# Altium PCB Riser.PcbDoc
Units mm, origin at the board's own origin, x right, y up, seen from the top; angles counter-clockwise.
Board outline 111.2 x 80.01 mm, 2 copper layers (Top Layer, Bottom Layer); 11 components, 61 nets, 322 pads, 0 vias.
Unrouted connection lines stored in the file: 1.
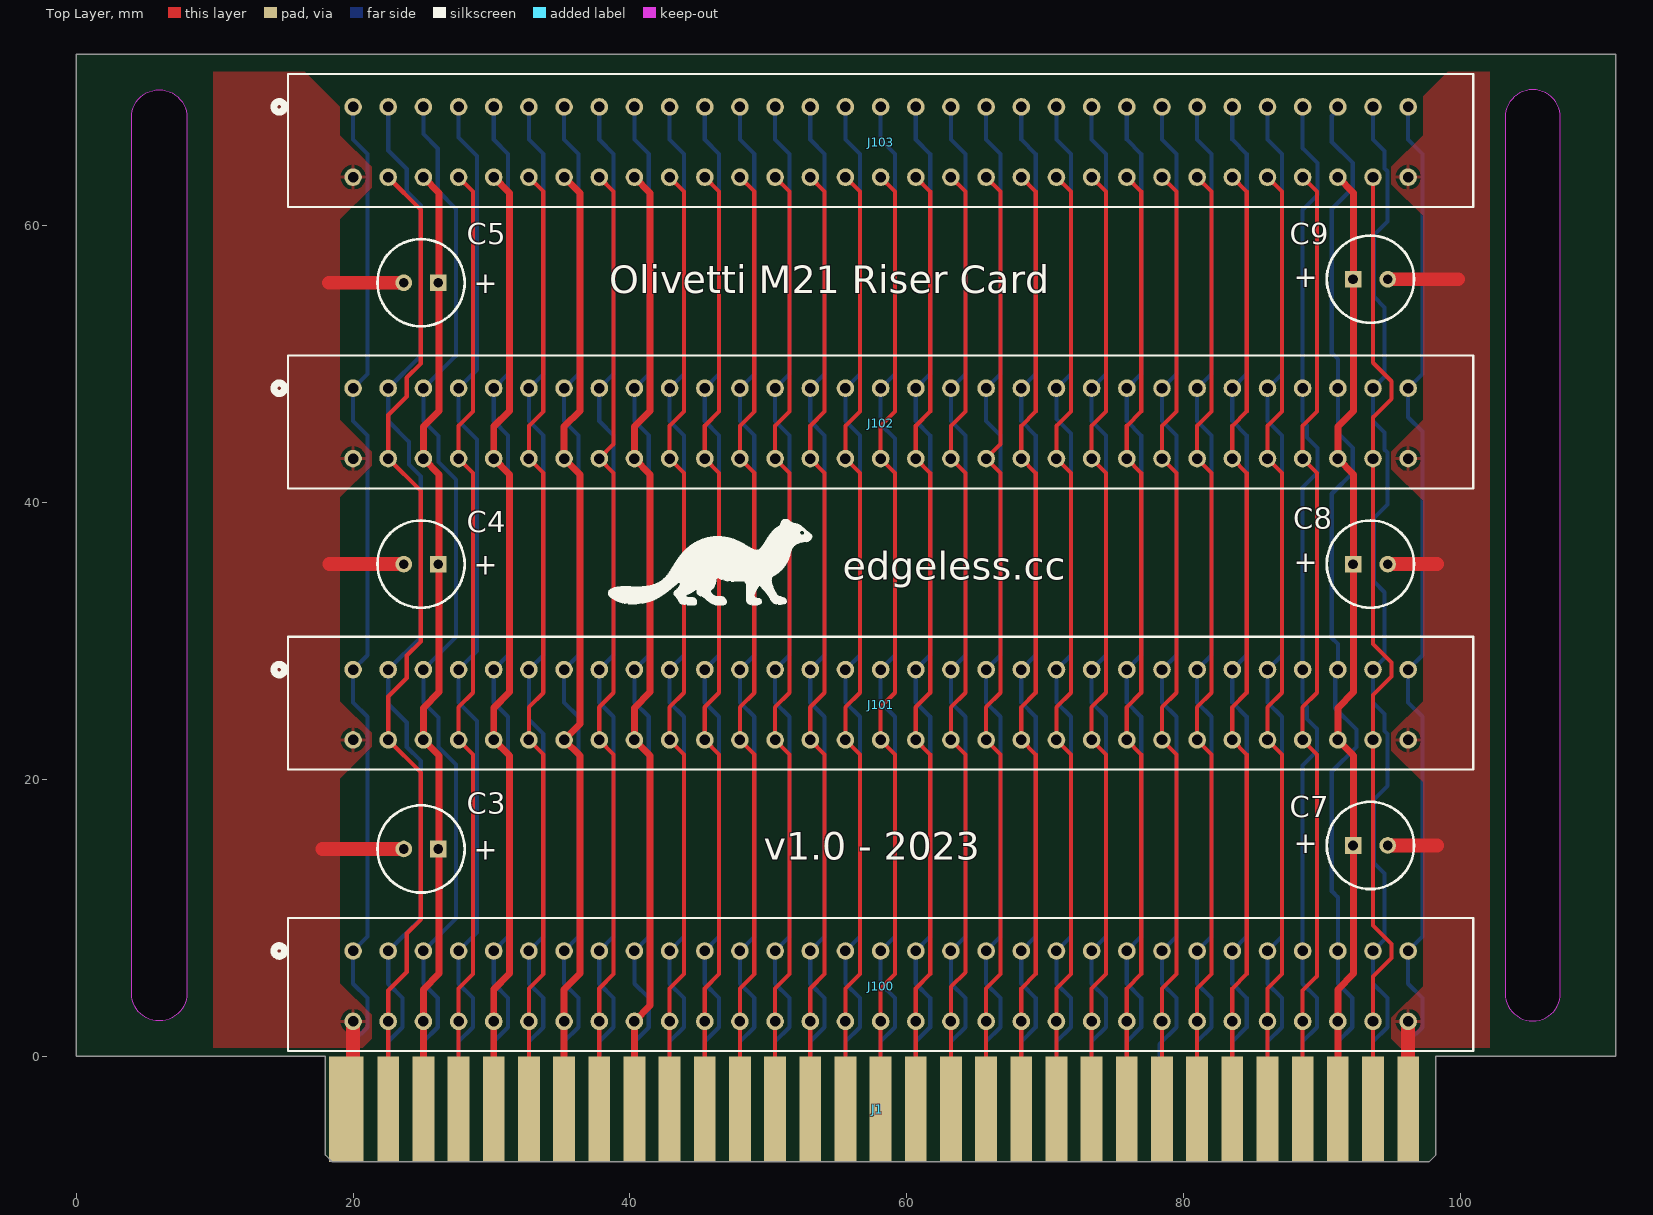
[diagram p0: Top Layer view]
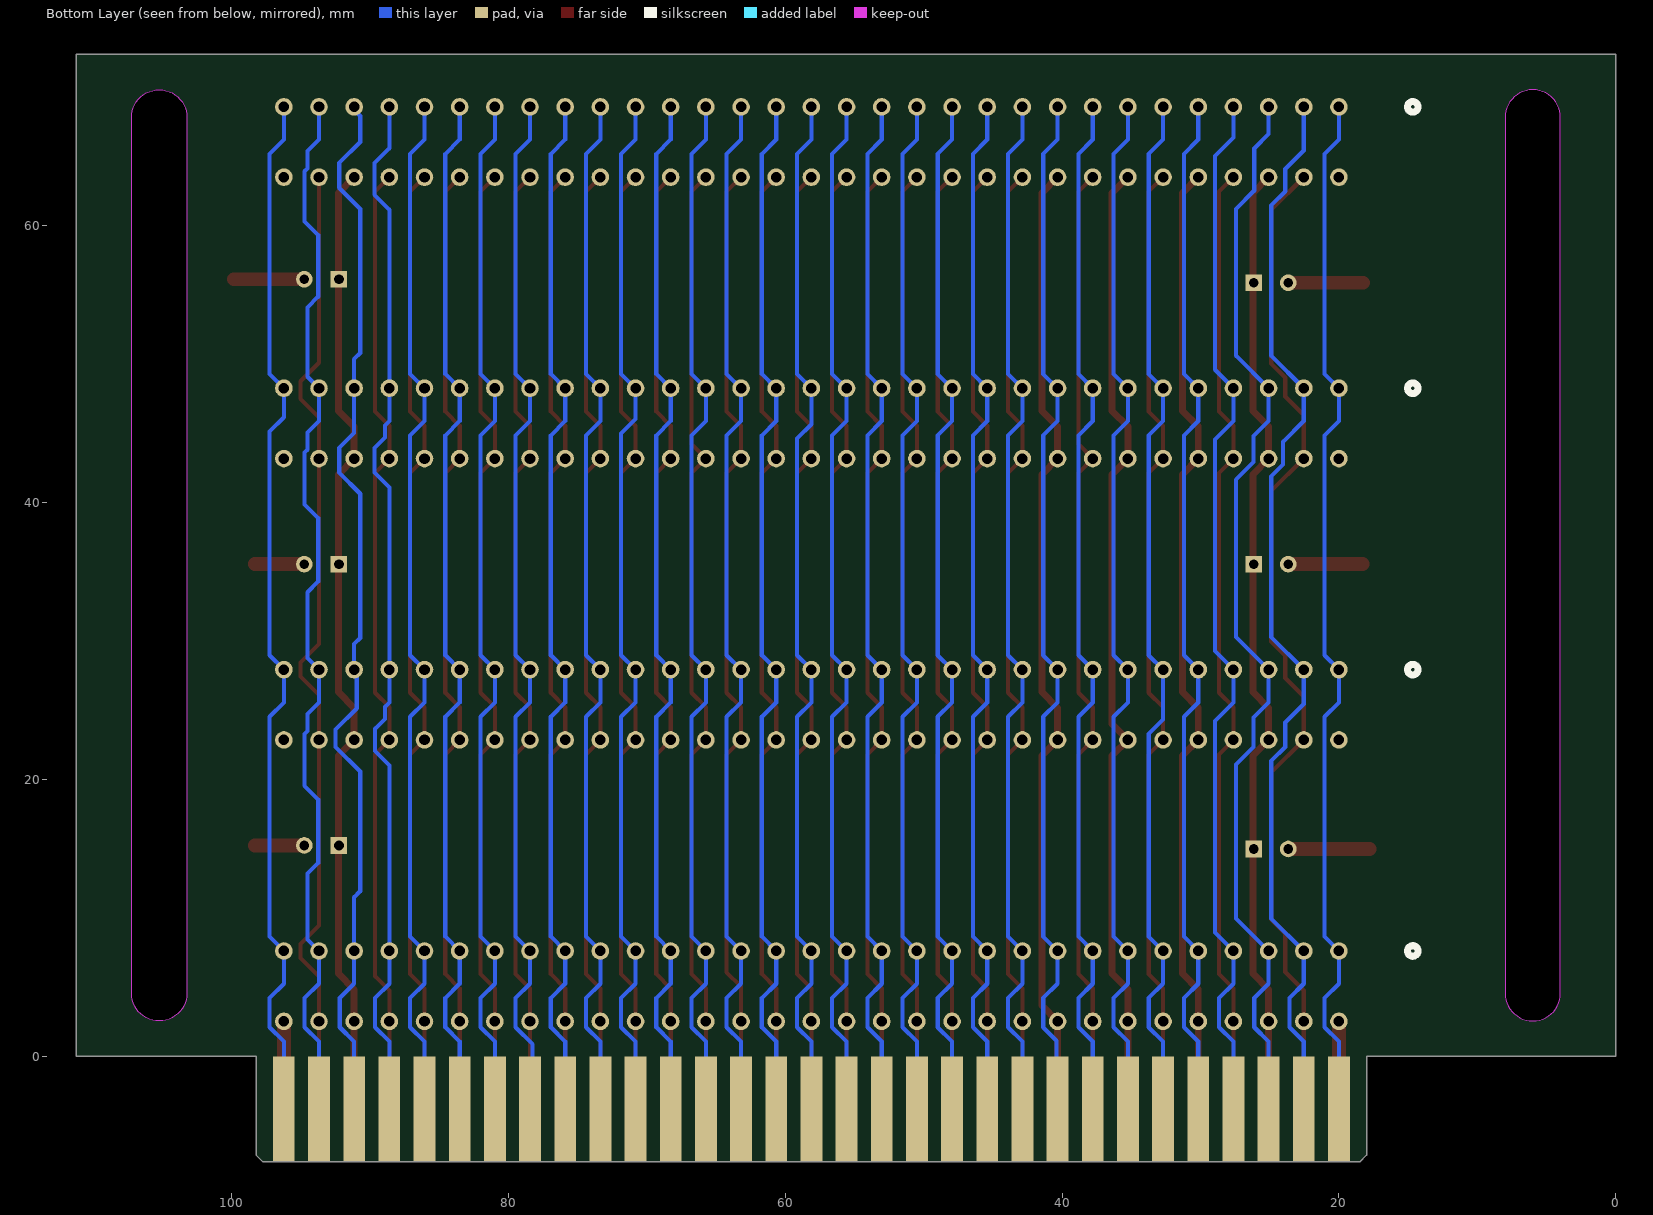
[diagram p1: Bottom Layer view, seen from below]

## Layer stack, top to bottom
Top Solder: solder mask 0.0102, Solder Resist, Dk 3.5
Top Layer: signal copper 0.0356
Dielectric 1: dielectric 0.32, FR-4, Dk 4.8
Bottom Layer: signal copper 0.0356
Bottom Solder: solder mask 0.0102, Solder Resist, Dk 3.5

## Board outline
97.696,-7.62 98.2,-7.116 98.2,0 111.2,0 111.2,72.39 0,72.39 0,0 18,0 18,-7.116 18.504,-7.62
cut-out: 103.2,4.572 ccw(c105.2,4.572) 107.2,4.572 107.2,67.818 ccw(c105.2,67.818) 103.2,67.818
cut-out: 4,4.572 4,67.818 cw(c6,67.818) 8,67.818 8,4.572 cw(c6,4.572)

## Design rules (kind name [scope] priority, off if disabled: settings)
Clearance [All] p1: gap=0.254 ignorepadtopadclearanceinfootprint=FALSE except(0: Arc-Hole Track-Hole SMDPad-Hole THPad-Hole Via-Hole Fill-Hole Poly-Hole Region-Hole Text-Hole)
PolygonConnect [All] p1: connectstyle=Relief reliefconductorwidth=0.254 reliefentries=4 polygonreliefangle="90 Angle" airgapwidth=0.254
RoutingVias [All] p1: holewidth=0.711 width=1.27 viastyle="Through Hole" minholewidth=0.711 minwidth=1.27 maxholewidth=0.711 maxwidth=1.27
SolderMaskExpansion [All] p1: expansion=0.102 istentingtop=FALSE
Width Width_PWR [InNetClass('PWR')] p1: maxlimit=2 minlimit=0.5 preferedwidth=0.5
Width [All] p2: maxlimit=2 minlimit=0.3 preferedwidth=0.3
30 further rules are at their usual default settings.

## Classes and differential pairs
net class PWR: B3_5V B5_N5V B7_N12V B9_12V B29_5V

## Components (designator, comment, footprint, x,y, rotation, side; value= is the part's Value field where it differs from the comment)
C3 "100u" CAP-6.3-2.5 24.912,14.986 r0 top
C4 "100u" CAP-6.3-2.5 24.912,35.56 r0 top
C5 "100u" CAP-6.3-2.5 24.912,55.88 r0 top
C7 "100u" CAP-6.3-2.5 93.472,15.24 r180 top
C8 "100u" CAP-6.3-2.5 93.472,35.56 r180 top
C9 "100u" CAP-6.3-2.5 93.472,56.134 r180 top
J1 "8-bit ISA edge connector" ISA-EDGE-62 20,-3.81 r180 top
J100 "6-5530843-5" CONN62_6-5530843-5_TEC 20,5.08 r0 top
J101 "6-5530843-5" CONN62_6-5530843-5_TEC 20,25.4 r0 top
J102 "6-5530843-5" CONN62_6-5530843-5_TEC 20,45.72 r0 top
J103 "6-5530843-5" CONN62_6-5530843-5_TEC 20,66.04 r0 top

## Footprints (in the part's own frame and the unit in brackets; to place one, negate y for a bottom-side part, rotate by r counter-clockwise, add the part's x,y. Pads: shape width x height; smd on the part's side, far side on the other; paste and mask are expansions set on the pad)
CAP-6.3-2.5 [mm] "Polarized Capacitor (Radial); 2 Leads, 6.3 mm, 2.5 mm leads"
  rect 1.2x1.2 hole 0.7: 1(1.25,0)
  round 1.2 hole 0.7: 2(-1.25,0)
  silkscreen extent -3.15,-3.15 3.15,3.15
CONN62_6-5530843-5_TEC [mil]
  round 50 / inner round 60 / far side round 50 hole 30 paste-25 mask+0: A1(0,100) A2(100,100) A3(200,100) A4(300,100) A5(400,100) A6(500,100) A7(600,100) A8(700,100) A9(800,100) A10(900,100) A11(1000,100) A12(1100,100) A13(1200,100) A14(1300,100) A15(1400,100) A16(1500,100) A17(1600,100) A18(1700,100) A19(1800,100) A20(1900,100) A21(2000,100) A22(2100,100) A23(2200,100) A24(2300,100) A25(2400,100) A26(2500,100) A27(2600,100) A28(2700,100) A29(2800,100) A30(2900,100) A31(3000,100) B1(0,-100) B2(100,-100) B3(200,-100) B4(300,-100) B5(400,-100) B6(500,-100) B7(600,-100) B8(700,-100) B9(800,-100) B10(900,-100) B11(1000,-100) B12(1100,-100) B13(1200,-100) B14(1300,-100) B15(1400,-100) B16(1500,-100) B17(1600,-100) B18(1700,-100) B19(1800,-100) B20(1900,-100) B21(2000,-100) B22(2100,-100) B23(2200,-100) B24(2300,-100) B25(2400,-100) B26(2500,-100) B27(2600,-100) B28(2700,-100) B29(2800,-100) B30(2900,-100) B31(3000,-100)
  silkscreen extent -225,-184 3185,194
ISA-EDGE-62 [mm]
  rect 1.575x7.62 smd far side paste+0 mask+0: A1(0,0) A2(-2.54,0) A3(-5.08,0) A4(-7.62,0) A5(-10.16,0) A6(-12.7,0) A7(-15.24,0) A8(-17.78,0) A9(-20.32,0) A10(-22.86,0) A11(-25.4,0) A12(-27.94,0) A13(-30.48,0) A14(-33.02,0) A15(-35.56,0) A16(-38.1,0) A17(-40.64,0) A18(-43.18,0) A19(-45.72,0) A20(-48.26,0) A21(-50.8,0) A22(-53.34,0) A23(-55.88,0) A24(-58.42,0) A25(-60.96,0) A26(-63.5,0) A27(-66.04,0) A28(-68.58,0) A29(-71.12,0) A30(-73.66,0) A31(-76.2,0)
  rect 2.5x7.62 smd paste+0 mask+0: B1(0.5,0)
  rect 1.575x7.62 smd paste+0 mask+0: B2(-2.54,0) B3(-5.08,0) B4(-7.62,0) B5(-10.16,0) B6(-12.7,0) B7(-15.24,0) B8(-17.78,0) B9(-20.32,0) B10(-22.86,0) B11(-25.4,0) B12(-27.94,0) B13(-30.48,0) B14(-33.02,0) B15(-35.56,0) B16(-38.1,0) B17(-40.64,0) B18(-43.18,0) B19(-45.72,0) B20(-48.26,0) B21(-50.8,0) B22(-53.34,0) B23(-55.88,0) B24(-58.42,0) B25(-60.96,0) B26(-63.5,0) B27(-66.04,0) B28(-68.58,0) B29(-71.12,0) B30(-73.66,0) B31(-76.2,0)

## Part data
C3 C4 C5 C7 C8 C9: library part "Cap Pol1", "Polarized Capacitor (Radial)", LatestRevisionDate=17-Jul-2002, LatestRevisionNote="Re-released for DXP Platform.", PackageDescription="Polarized Capacitor (Radial); 2 Leads", PackageReference=RB7.6-15, Published=8-Jun-2000, Publisher="Altium Limited"
J1: library part ISA-EDGE-62
J100 J101 J102 J103: "No Description Available"

## Nets (pads, with @x,y where several pads share a name; then routed paths per layer and width w, separated by ;. In a path a pad name is that pad's centre, name@x,y a point inside that pad or via, vN(x,y) a via of type N, cw(c..) or ccw(c..) an arc to the next point about the centre after c; other vN are vias at no path point)
B1_GND: C3.2 C4.2 C5.2 C7.2 C8.2 C9.2 J1.B1 J1.B31 J100.B1 J100.B31 J101.B1 J101.B31 J102.B1 J102.B31 J103.B1 J103.B31 | length 41.6
  Top Layer w1: 17.78,14.986 C3.2 ; 18.254,55.88 C5.2 ; 18.288,35.56 C4.2 ; J1.B1@20,-3.81 J100.B1 ; C7.2 98.298,15.24 ; C8.2 98.298,35.56 ; C9.2 99.822,56.134 ; J1.B31 J100.B31
B3_5V: C3.1 C4.1 C5.1 J1.B3 J100.B3 J101.B3 J102.B3 J103.B3 | length 70.1
  Top Layer w0.5: J1.B3 25.08,4.851 26.219,5.99 26.219,21.721 J101.B3 25.08,25.171 26.219,26.31 26.219,42.041 J102.B3 25.08,45.491 26.219,46.63 26.219,62.361 J103.B3
B5_N5V: J1.B5 J100.B5 J101.B5 J102.B5 J103.B5 | length 70.1
  Top Layer w0.5: J1.B5 J100.B5 30.16,4.851 31.299,5.99 31.299,21.721 J101.B5 30.16,25.171 31.299,26.31 31.299,42.041 J102.B5 30.16,45.491 31.299,46.63 31.299,62.361 J103.B5
B7_N12V: J1.B7 J100.B7 J101.B7 J102.B7 J103.B7 | length 70.1
  Top Layer w0.5: J1.B7 J100.B7 35.24,4.851 36.379,5.99 36.379,21.721 J101.B7 36.379,23.999 36.379,42.041 J102.B7 35.24,45.491 36.379,46.63 36.379,62.361 J103.B7
B9_12V: J1.B9 J100.B9 J101.B9 J102.B9 J103.B9 | length 70.1
  Top Layer w0.5: J1.B9 J100.B9 41.459,3.679 41.459,21.721 J101.B9 40.32,25.171 41.459,26.31 41.459,42.041 J102.B9 40.32,45.491 41.459,46.63 41.459,62.361 J103.B9
B29_5V: C7.1 C8.1 C9.1 J1.B29 J100.B29 J101.B29 J102.B29 J103.B29 | length 70.1
  Top Layer w0.5: J1.B29 J100.B29 91.12,4.851 92.259,5.99 92.259,21.721 J101.B29 91.12,25.171 92.259,26.31 92.259,42.041 J102.B29 91.12,45.491 92.259,46.63 92.259,62.361 J103.B29
NetJ1_A1: J1.A1 J100.A1 J101.A1 J102.A1 J103.A1 | length 75.8
  Bottom Layer w0.3: J1.A1 20,1.071 21.039,2.11 21.039,4.214 20,5.253 J100.A1 21.039,8.659 21.039,24.534 20,25.573 J101.A1 21.039,28.979 21.039,44.854 20,45.893 J102.A1 21.039,49.299 21.039,65.174 20,66.213 J103.A1
NetJ1_A2: J1.A2 J100.A2 J101.A2 J102.A2 J103.A2 | length 79.1
  Bottom Layer w0.3: J1.A2 22.54,1.071 23.579,2.11 23.579,4.214 22.54,5.253 J100.A2 24.892,9.972 24.892,21.336 23.876,22.352 23.876,24.113 22.54,25.449 J101.A2 24.892,30.292 24.892,41.899 24.041,42.75 24.041,44.392 22.54,45.893 J102.A2 24.892,50.612 24.892,61.468 23.876,62.484 23.876,64.095 22.54,65.431 J103.A2
NetJ1_A3: J1.A3 J100.A3 J101.A3 J102.A3 J103.A3 | length 79.1
  Bottom Layer w0.3: J1.A3 25.08,1.071 26.119,2.11 26.119,4.214 25.08,5.253 J100.A3 27.432,9.972 27.432,21.082 26.162,22.352 26.162,24.491 25.08,25.573 J101.A3 27.432,30.292 27.432,41.656 26.162,42.926 26.162,44.811 25.08,45.893 J102.A3 27.432,50.612 27.432,61.214 26.119,62.527 26.119,65.575 25.08,66.614 J103.A3
NetJ1_A4: J1.A4 J100.A4 J101.A4 J102.A4 J103.A4 | length 76.6
  Bottom Layer w0.3: J1.A4 27.62,1.071 28.659,2.11 28.659,4.214 27.62,5.253 J100.A4 28.956,8.956 28.956,24.237 27.62,25.573 J101.A4 28.956,29.276 28.956,44.557 27.62,45.893 J102.A4 28.956,49.596 28.956,65.024 27.62,66.36 J103.A4
NetJ1_A5: J1.A5 J100.A5 J101.A5 J102.A5 J103.A5 | length 75.8
  Bottom Layer w0.3: J1.A5 30.16,1.071 31.199,2.11 31.199,4.214 30.16,5.253 J100.A5 31.199,8.659 31.199,24.534 30.16,25.573 J101.A5 31.199,28.979 31.199,44.854 30.16,45.893 J102.A5 31.199,49.299 31.199,65.174 30.16,66.213 J103.A5
NetJ1_A6: J1.A6 J100.A6 J101.A6 J102.A6 J103.A6 | length 75.8
  Bottom Layer w0.3: J1.A6 32.7,1.071 33.739,2.11 33.739,4.214 32.7,5.253 J100.A6 33.739,8.659 33.739,23.29 32.7,24.329 J101.A6 33.739,28.979 33.739,44.854 32.7,45.893 J102.A6 33.739,49.299 33.739,65.174 32.7,66.213 J103.A6
NetJ1_A7: J1.A7 J100.A7 J101.A7 J102.A7 J103.A7 | length 75.8
  Bottom Layer w0.3: J1.A7 35.24,1.071 36.279,2.11 36.279,4.214 35.24,5.253 J100.A7 36.279,8.659 36.279,24.534 35.24,25.573 J101.A7 36.279,28.979 36.279,44.854 35.24,45.893 J102.A7 36.279,49.299 36.279,65.174 35.24,66.213 J103.A7
NetJ1_A8: J1.A8 J100.A8 J101.A8 J102.A8 J103.A8 | length 75.8
  Bottom Layer w0.3: J1.A8 37.78,1.071 38.819,2.11 38.819,4.214 37.78,5.253 J100.A8 38.819,8.659 38.819,24.534 37.78,25.573 J101.A8 38.819,28.979 38.819,44.854 37.78,45.893 J102.A8 38.819,49.299 38.819,65.174 37.78,66.213 J103.A8
NetJ1_A9: J1.A9 J100.A9 J101.A9 J102.A9 J103.A9 | length 75.8
  Bottom Layer w0.3: J1.A9 40.386,-3.744 40.386,1.137 41.359,2.11 41.359,4.214 40.32,5.253 J100.A9 41.359,8.659 41.359,24.534 40.32,25.573 J101.A9 41.359,28.979 41.359,44.854 40.32,45.893 J102.A9 41.359,49.299 41.359,65.174 40.32,66.213 J103.A9
NetJ1_A10: J1.A10 J100.A10 J101.A10 J102.A10 J103.A10 | length 75.8
  Bottom Layer w0.3: J1.A10 42.86,1.071 43.899,2.11 43.899,4.214 42.86,5.253 J100.A10 43.899,8.659 43.899,24.534 42.86,25.573 J101.A10 43.899,28.979 43.899,44.854 42.86,45.893 J102.A10 43.899,49.299 43.899,65.174 42.86,66.213 J103.A10
NetJ1_A11: J1.A11 J100.A11 J101.A11 J102.A11 J103.A11 | length 75.8
  Bottom Layer w0.3: J1.A11 45.4,1.071 46.439,2.11 46.439,4.214 45.4,5.253 J100.A11 46.439,8.659 46.439,24.534 45.4,25.573 J101.A11 46.439,28.979 46.439,44.854 45.4,45.893 J102.A11 46.439,49.299 46.439,65.174 45.4,66.213 J103.A11
NetJ1_A12: J1.A12 J100.A12 J101.A12 J102.A12 J103.A12 | length 75.8
  Bottom Layer w0.3: J1.A12 47.94,1.071 48.979,2.11 48.979,4.214 47.94,5.253 J100.A12 48.979,8.659 48.979,24.534 47.94,25.573 J101.A12 48.979,28.979 48.979,44.854 47.94,45.893 J102.A12 48.979,49.299 48.979,65.174 47.94,66.213 J103.A12
NetJ1_A13: J1.A13 J100.A13 J101.A13 J102.A13 J103.A13 | length 75.8
  Bottom Layer w0.3: J1.A13 50.48,1.071 51.519,2.11 51.519,4.214 50.48,5.253 J100.A13 51.519,8.659 51.519,24.534 50.48,25.573 J101.A13 51.519,28.979 51.519,44.854 50.48,45.893 J102.A13 51.519,49.299 51.519,65.174 50.48,66.213 J103.A13
NetJ1_A14: J1.A14 J100.A14 J101.A14 J102.A14 J103.A14 | length 75.8
  Bottom Layer w0.3: J1.A14 53.02,1.071 54.059,2.11 54.059,4.214 53.02,5.253 J100.A14 54.059,8.659 54.059,24.534 53.02,25.573 J101.A14 54.059,28.979 54.059,44.854 53.02,45.893 J102.A14 54.059,49.299 54.059,65.174 53.02,66.213 J103.A14
NetJ1_A15: J1.A15 J100.A15 J101.A15 J102.A15 J103.A15 | length 75.8
  Bottom Layer w0.3: J1.A15 55.56,1.071 56.599,2.11 56.599,4.214 55.56,5.253 J100.A15 56.599,8.659 56.599,24.534 55.56,25.573 J101.A15 56.599,28.979 56.599,44.854 55.56,45.893 J102.A15 56.599,49.299 56.599,65.174 55.56,66.213 J103.A15
NetJ1_A16: J1.A16 J100.A16 J101.A16 J102.A16 J103.A16 | length 75.8
  Bottom Layer w0.3: J1.A16 58.1,1.071 59.139,2.11 59.139,4.214 58.1,5.253 J100.A16 59.139,8.659 59.139,24.534 58.1,25.573 J101.A16 59.139,28.979 59.139,44.62 58.1,45.659 J102.A16 59.139,49.299 59.139,65.174 58.1,66.213 J103.A16
NetJ1_A17: J1.A17 J100.A17 J101.A17 J102.A17 J103.A17 | length 75.8
  Bottom Layer w0.3: J1.A17 60.64,1.071 61.679,2.11 61.679,4.214 60.64,5.253 J100.A17 61.679,8.659 61.679,24.534 60.64,25.573 J101.A17 61.679,28.979 61.679,44.854 60.64,45.893 J102.A17 61.679,49.299 61.679,65.174 60.64,66.213 J103.A17
NetJ1_A18: J1.A18 J100.A18 J101.A18 J102.A18 J103.A18 | length 75.8
  Bottom Layer w0.3: J1.A18 63.18,1.071 64.219,2.11 64.219,4.214 63.18,5.253 J100.A18 64.219,8.659 64.219,24.534 63.18,25.573 J101.A18 64.219,28.979 64.219,44.854 63.18,45.893 J102.A18 64.219,49.299 64.219,65.174 63.18,66.213 J103.A18
NetJ1_A19: J1.A19 J100.A19 J101.A19 J102.A19 J103.A19 | length 75.8
  Bottom Layer w0.3: J1.A19 65.72,1.071 66.759,2.11 66.759,4.214 65.72,5.253 J100.A19 66.759,8.659 66.759,24.534 65.72,25.573 J101.A19 66.759,28.979 66.759,44.854 65.72,45.893 J102.A19 66.759,49.299 66.759,65.174 65.72,66.213 J103.A19
NetJ1_A20: J1.A20 J100.A20 J101.A20 J102.A20 J103.A20 | length 75.8
  Bottom Layer w0.3: J1.A20 68.26,1.071 69.299,2.11 69.299,4.214 68.26,5.253 J100.A20 69.299,8.659 69.299,24.534 68.26,25.573 J101.A20 69.299,28.979 69.299,44.854 68.26,45.893 J102.A20 69.299,49.299 69.299,65.174 68.26,66.213 J103.A20
NetJ1_A21: J1.A21 J100.A21 J101.A21 J102.A21 J103.A21 | length 75.8
  Bottom Layer w0.3: J1.A21 70.8,1.071 71.839,2.11 71.839,4.214 70.8,5.253 J100.A21 71.839,8.659 71.839,24.534 70.8,25.573 J101.A21 71.839,28.979 71.839,45.001 70.8,46.04 J102.A21 71.839,49.299 71.839,65.174 70.8,66.213 J103.A21
NetJ1_A22: J1.A22 J100.A22 J101.A22 J102.A22 J103.A22 | length 75.8
  Bottom Layer w0.3: J1.A22 73.34,1.071 74.379,2.11 74.379,4.214 73.34,5.253 J100.A22 74.379,8.659 74.379,24.534 73.34,25.573 J101.A22 74.379,28.979 74.379,44.854 73.34,45.893 J102.A22 74.379,49.299 74.379,65.174 73.34,66.213 J103.A22
NetJ1_A23: J1.A23 J100.A23 J101.A23 J102.A23 J103.A23 | length 75.8
  Bottom Layer w0.3: J1.A23 75.88,1.071 76.919,2.11 76.919,4.214 75.88,5.253 J100.A23 76.919,8.659 76.919,24.534 75.88,25.573 J101.A23 76.919,28.979 76.919,44.854 75.88,45.893 J102.A23 76.919,49.299 76.919,65.174 75.88,66.213 J103.A23
NetJ1_A24: J1.A24 J100.A24 J101.A24 J102.A24 J103.A24 | length 76
  Bottom Layer w0.3: J1.A24 78.238,-3.628 78.238,0.889 79.459,2.11 79.459,4.214 78.42,5.253 J100.A24 79.459,8.659 79.459,24.534 78.42,25.573 J101.A24 79.459,28.979 79.459,44.854 78.42,45.893 J102.A24 79.459,49.299 79.459,65.174 78.42,66.213 J103.A24
NetJ1_A25: J1.A25 J100.A25 J101.A25 J102.A25 J103.A25 | length 75.8
  Bottom Layer w0.3: J1.A25 80.96,1.071 81.999,2.11 81.999,4.214 80.96,5.253 J100.A25 81.999,8.659 81.999,24.534 80.96,25.573 J101.A25 81.999,28.979 81.999,44.854 80.96,45.893 J102.A25 81.999,49.299 81.999,65.174 80.96,66.213 J103.A25
NetJ1_A26: J1.A26 J100.A26 J101.A26 J102.A26 J103.A26 | length 75.8
  Bottom Layer w0.3: J1.A26 83.5,1.071 84.539,2.11 84.539,4.214 83.5,5.253 J100.A26 84.539,8.659 84.539,24.534 83.5,25.573 J101.A26 84.539,28.979 84.539,44.854 83.5,45.893 J102.A26 84.539,49.299 84.539,65.174 83.5,66.213 J103.A26
NetJ1_A27: J1.A27 J100.A27 J101.A27 J102.A27 J103.A27 | length 75.8
  Bottom Layer w0.3: J1.A27 86.04,1.071 87.079,2.11 87.079,4.214 86.04,5.253 J100.A27 87.079,8.659 87.079,24.534 86.04,25.573 J101.A27 87.079,28.979 87.079,44.854 86.04,45.893 J102.A27 87.079,49.299 87.079,65.174 86.04,66.213 J103.A27
NetJ1_A28: J1.A28 J100.A28 J101.A28 J102.A28 J103.A28 | length 75.9
  Bottom Layer w0.3: J1.A28 88.58,1.071 89.619,2.11 89.619,4.214 88.58,5.253 J100.A28 88.58,21.016 89.619,22.055 89.619,23.665 88.9,24.384 88.9,25.253 88.58,25.573 J101.A28 88.58,41.082 89.662,42.164 89.662,43.942 88.9,44.704 88.9,45.573 88.58,45.893 J102.A28 88.58,61.148 89.662,62.23 89.662,64.516 88.58,65.598 J103.A28
NetJ1_A29: J1.A29 J100.A29 J101.A29 J102.A29 J103.A29 | length 77.5
  Bottom Layer w0.3: J1.A29 91.12,1.071 92.159,2.11 92.159,4.214 91.12,5.253 J100.A29 91.12,7.839 91.12,11.496 90.678,11.938 90.678,20.574 92.456,22.352 92.456,23.622 90.932,25.146 90.932,27.49 J101.A29@91.12,27.678 ; J101.A29 91.12,29.784 90.678,30.226 90.678,40.64 92.202,42.164 92.202,43.942 91.12,45.024 J102.A29 91.12,48.479 91.12,50.358 90.678,50.8 90.678,61.214 92.202,62.738 92.202,64.516 90.678,66.04 90.678,67.919 91.12,68.361 J103.A29
NetJ1_A30: J1.A30 J100.A30 J101.A30 J102.A30 J103.A30 | length 77.7
  Bottom Layer w0.3: J1.A30 93.66,1.071 94.699,2.11 94.699,4.214 93.66,5.253 J100.A30 94.488,8.448 94.488,13.208 93.718,13.978 93.718,18.567 94.699,19.548 94.699,23.29 94.488,23.501 94.488,24.745 93.66,25.573 J101.A30 94.488,28.768 94.488,33.528 93.718,34.298 93.718,38.887 94.699,39.868 94.699,43.61 94.488,43.821 94.488,45.065 93.66,45.893 J102.A30 94.488,49.088 94.488,54.102 93.718,54.872 93.718,59.334 94.699,60.315 94.699,63.93 94.488,64.141 94.488,65.385 93.66,66.213 J103.A30
NetJ1_A31: J1.A31 J100.A31 J101.A31 J102.A31 J103.A31 | length 75.8
  Bottom Layer w0.3: J1.A31 96.2,1.071 97.239,2.11 97.239,4.214 96.2,5.253 J100.A31 97.239,8.659 97.239,24.534 96.2,25.573 J101.A31 97.239,28.979 97.239,45.128 96.2,46.167 J102.A31 97.239,49.299 97.239,65.174 96.2,66.213 J103.A31
NetJ1_B2: J1.B2 J100.B2 J101.B2 J102.B2 J103.B2 | length 73.2
  Top Layer w0.3: J1.B2 J100.B2 22.54,4.76 23.876,6.096 23.876,8.89 24.892,9.906 24.892,20.508 J101.B2 22.54,26.009 23.876,27.345 23.876,28.956 24.892,29.972 24.892,40.828 J102.B2 22.54,46.329 23.876,47.665 23.876,49.022 24.892,50.038 24.892,61.148 J103.B2
NetJ1_B4: J1.B4 J100.B4 J101.B4 J102.B4 J103.B4 | length 69.9
  Top Layer w0.3: J1.B4 J100.B4 27.62,4.907 28.659,5.946 28.659,21.821 J101.B4 27.62,25.227 28.659,26.266 28.659,42.141 J102.B4 27.62,45.547 28.659,46.586 28.659,62.461 J103.B4
NetJ1_B6: J1.B6 J100.B6 J101.B6 J102.B6 J103.B6 | length 69.9
  Top Layer w0.3: J1.B6 J100.B6 32.7,4.907 33.739,5.946 33.739,21.821 J101.B6 32.7,25.227 33.739,26.266 33.739,42.141 J102.B6 32.7,45.547 33.739,46.586 33.739,62.461 J103.B6
NetJ1_B8: J1.B8 J100.B8 J101.B8 J102.B8 J103.B8 | length 69.9
  Top Layer w0.3: J1.B8 J100.B8 37.78,4.907 38.819,5.946 38.819,21.821 J101.B8 37.78,25.227 38.819,26.266 38.819,42.141 J102.B8 38.819,44.219 38.819,62.461 J103.B8
NetJ1_B10: J1.B10 J100.B10 J101.B10 J102.B10 J103.B10 | length 69.9
  Top Layer w0.3: J1.B10 J100.B10 42.86,4.907 43.899,5.946 43.899,21.821 J101.B10 42.86,25.227 43.899,26.266 43.899,42.141 J102.B10 42.86,45.547 43.899,46.586 43.899,62.461 J103.B10
NetJ1_B11: J1.B11 J100.B11 J101.B11 J102.B11 J103.B11 | length 69.9
  Top Layer w0.3: J1.B11 J100.B11 45.4,4.907 46.439,5.946 46.439,21.821 J101.B11 45.4,25.227 46.439,26.266 46.439,42.141 J102.B11 45.4,45.547 46.439,46.586 46.439,62.461 J103.B11
NetJ1_B12: J1.B12 J100.B12 J101.B12 J102.B12 J103.B12 | length 69.9
  Top Layer w0.3: J1.B12 J100.B12 47.94,4.907 48.979,5.946 48.979,21.821 J101.B12 47.94,25.227 48.979,26.266 48.979,42.141 J102.B12 47.94,45.547 48.979,46.586 48.979,62.461 J103.B12
NetJ1_B13: J1.B13 J100.B13 J101.B13 J102.B13 J103.B13 | length 69.9
  Top Layer w0.3: J1.B13 J100.B13 50.48,4.907 51.519,5.946 51.519,21.821 J101.B13 50.48,25.227 51.519,26.266 51.519,42.141 J102.B13 50.48,45.547 51.519,46.586 51.519,62.461 J103.B13
NetJ1_B14: J1.B14 J100.B14 J101.B14 J102.B14 J103.B14 | length 69.9
  Top Layer w0.3: J1.B14 J100.B14 53.02,4.907 54.059,5.946 54.059,21.821 J101.B14 53.02,25.227 54.059,26.266 54.059,42.141 J102.B14 53.02,45.547 54.059,46.586 54.059,62.461 J103.B14
NetJ1_B15: J1.B15 J100.B15 J101.B15 J102.B15 J103.B15 | length 69.9
  Top Layer w0.3: J1.B15 J100.B15 55.56,4.907 56.599,5.946 56.599,21.821 J101.B15 55.56,25.227 56.599,26.266 56.599,42.141 J102.B15 55.56,45.547 56.599,46.586 56.599,62.461 J103.B15
NetJ1_B16: J1.B16 J100.B16 J101.B16 J102.B16 J103.B16 | length 69.9
  Top Layer w0.3: J1.B16 J100.B16 58.1,4.907 59.139,5.946 59.139,21.821 J101.B16 58.1,25.227 59.139,26.266 59.139,42.141 J102.B16 58.1,45.547 59.139,46.586 59.139,62.461 J103.B16
NetJ1_B17: J1.B17 J100.B17 J101.B17 J102.B17 J103.B17 | length 69.9
  Top Layer w0.3: J1.B17 J100.B17 60.64,4.907 61.679,5.946 61.679,21.821 J101.B17 60.64,25.227 61.679,26.266 61.679,42.141 J102.B17 60.64,45.547 61.679,46.586 61.679,62.461 J103.B17
NetJ1_B18: J1.B18 J100.B18 J101.B18 J102.B18 J103.B18 | length 69.9
  Top Layer w0.3: J1.B18 J100.B18 63.18,5.04 64.219,6.079 64.219,21.821 J101.B18 63.18,25.227 64.219,26.266 64.219,42.141 J102.B18 63.18,45.547 64.219,46.586 64.219,62.461 J103.B18
NetJ1_B19: J1.B19 J100.B19 J101.B19 J102.B19 J103.B19 | length 69.9
  Top Layer w0.3: J1.B19 J100.B19 65.72,4.907 66.759,5.946 66.759,21.821 J101.B19 65.72,25.227 66.759,26.266 66.759,42.141 J102.B19 66.759,44.219 66.759,62.461 J103.B19
NetJ1_B20: J1.B20 J100.B20 J101.B20 J102.B20 J103.B20 | length 69.9
  Top Layer w0.3: J1.B20 J100.B20 68.26,4.907 69.299,5.946 69.299,21.821 J101.B20 68.26,25.227 69.299,26.266 69.299,42.141 J102.B20 68.26,45.547 69.299,46.586 69.299,62.461 J103.B20
NetJ1_B21: J1.B21 J100.B21 J101.B21 J102.B21 J103.B21 | length 69.9
  Top Layer w0.3: J1.B21 J100.B21 70.8,4.907 71.839,5.946 71.839,21.821 J101.B21 70.8,25.227 71.839,26.266 71.839,42.141 J102.B21 70.8,45.547 71.839,46.586 71.839,62.461 J103.B21
NetJ1_B22: J1.B22 J100.B22 J101.B22 J102.B22 J103.B22 | length 69.9
  Top Layer w0.3: J1.B22 J100.B22 73.34,4.907 74.379,5.946 74.379,21.821 J101.B22 73.34,25.227 74.379,26.266 74.379,42.141 J102.B22 73.34,45.547 74.379,46.586 74.379,62.461 J103.B22
NetJ1_B23: J1.B23 J100.B23 J101.B23 J102.B23 J103.B23 | length 69.9
  Top Layer w0.3: J1.B23 J100.B23 75.88,4.907 76.919,5.946 76.919,21.821 J101.B23 75.88,25.227 76.919,26.266 76.919,42.141 J102.B23 75.88,45.547 76.919,46.586 76.919,62.461 J103.B23
NetJ1_B24: J1.B24 J100.B24 J101.B24 J102.B24 J103.B24 | length 69.9
  Top Layer w0.3: J1.B24 J100.B24 78.42,4.907 79.459,5.946 79.459,21.821 J101.B24 78.42,25.227 79.459,26.266 79.459,42.141 J102.B24 78.42,45.547 79.459,46.586 79.459,62.461 J103.B24
NetJ1_B25: J1.B25 J100.B25 J101.B25 J102.B25 J103.B25 | length 69.9
  Top Layer w0.3: J1.B25 J100.B25 80.96,4.907 81.999,5.946 81.999,21.821 J101.B25 80.96,25.227 81.999,26.266 81.999,42.141 J102.B25 80.96,45.547 81.999,46.586 81.999,62.461 J103.B25
NetJ1_B26: J1.B26 J100.B26 J101.B26 J102.B26 J103.B26 | length 69.9
  Top Layer w0.3: J1.B26 J100.B26 83.5,4.907 84.539,5.946 84.539,21.821 J101.B26 83.5,25.227 84.539,26.266 84.539,42.141 J102.B26 83.5,45.547 84.539,46.586 84.539,62.461 J103.B26
NetJ1_B27: J1.B27 J100.B27 J101.B27 J102.B27 J103.B27 | length 69.9
  Top Layer w0.3: J1.B27 J100.B27 86.04,4.907 87.079,5.946 87.079,21.821 J101.B27 86.04,25.227 87.079,26.266 87.079,42.141 J102.B27 86.04,45.547 87.079,46.586 87.079,62.461 J103.B27
NetJ1_B28: J1.B28 J100.B28 J101.B28 J102.B28 J103.B28 | length 69.9
  Top Layer w0.3: J1.B28 J100.B28 88.58,4.76 89.619,5.799 89.619,21.821 J101.B28 88.58,25.227 89.619,26.266 89.619,42.141 J102.B28 88.58,45.547 89.619,46.586 89.619,62.461 J103.B28
NetJ1_B30: J1.B30 J100.B30 J101.B30 J102.B30 J103.B30 | length 70.6
  Top Layer w0.3: J1.B30 J100.B30 93.66,5.776 94.996,7.112 94.996,8.128 93.66,9.464 J101.B30 93.66,26.096 94.996,27.432 94.996,28.448 93.66,29.784 J102.B30 93.66,46.162 94.996,47.498 94.996,48.768 93.66,50.104 J103.B30

## Polygon pours and split planes (outlines as drawn)
B1_GND on Top Layer "B1_GND_L01_P006" (solid, pour order 6): 102.108,71.12 99.06,71.12 97.282,69.342 97.282,66.548 94.996,64.262 94.996,62.992 97.282,60.706 97.282,45.974 94.996,43.688 94.996,42.418 97.282,40.132 97.282,25.654 94.996,23.368 94.996,22.098 97.282,19.812 97.282,5.08 94.996,2.794 94.996,1.27 95.626,0.64 102.108,0.64
B1_GND on Top Layer "B1_GND_L01_P001" (solid, pour order 1): 16.51,71.12 19.05,68.58 19.05,66.548 21.336,64.262 21.336,62.738 19.05,60.452 19.05,45.974 21.336,43.688 21.336,42.672 19.05,40.386 19.05,25.654 21.336,23.368 21.336,22.352 19.05,20.066 19.05,5.294 21.336,3.008 21.336,1.27 20.706,0.64 9.906,0.64 9.906,71.12

## Silkscreen, mask and mechanical layers (free items; w line width, h text height)
Top Overlay:
  region: 2445 vertices and 1 holes, not listed, extent 38.42,32.586 53.152,38.813
  text "Olivetti M21 Riser Card" at 38.507,55.11 h2
  text "edgeless.cc" at 55.364,34.44 h2
  text "v1.0 - 2023" at 49.67,14.216 h2
Top Solder:
  rectangle: 18,-7.618 98.2,0
Bottom Solder:
  rectangle: 18,-7.618 98.2,0
Mechanical 1:
  lines w0.1: 0,0 18,0 18,-7.116 18.504,-7.62 97.696,-7.62 98.2,-7.116 98.2,0 111.2,0 111.2,72.39 0,72.39 0,0
  lines w0.254: 4,4.572 ccw(c6,4.572) 8,4.572 8,67.818 ccw(c6,67.818) 4,67.818 4,4.572 ; 103.2,4.572 ccw(c105.2,4.572) 107.2,4.572 107.2,67.818 ccw(c105.2,67.818) 103.2,67.818 103.2,4.572
  text "SLOTTED HOLE" at 105.614,41.726 h1 r90
  text "SLOTTED HOLE" at 6.424,40.714 h1 r90

## Text inside footprints (layer, text, board x,y; h text height)
C3: Top Overlay "+" at 28.722,14.224 h1.5
C4: Top Overlay "+" at 28.722,34.798 h1.5
C5: Top Overlay "+" at 28.722,55.118 h1.5
C7: Top Overlay "+" at 89.662,16.002 h1.5 r180
C8: Top Overlay "+" at 89.662,36.322 h1.5 r180
C9: Top Overlay "+" at 89.662,56.896 h1.5 r180